# EAGLE board Tapuino-with-mux (EAGLE 7.1.0)
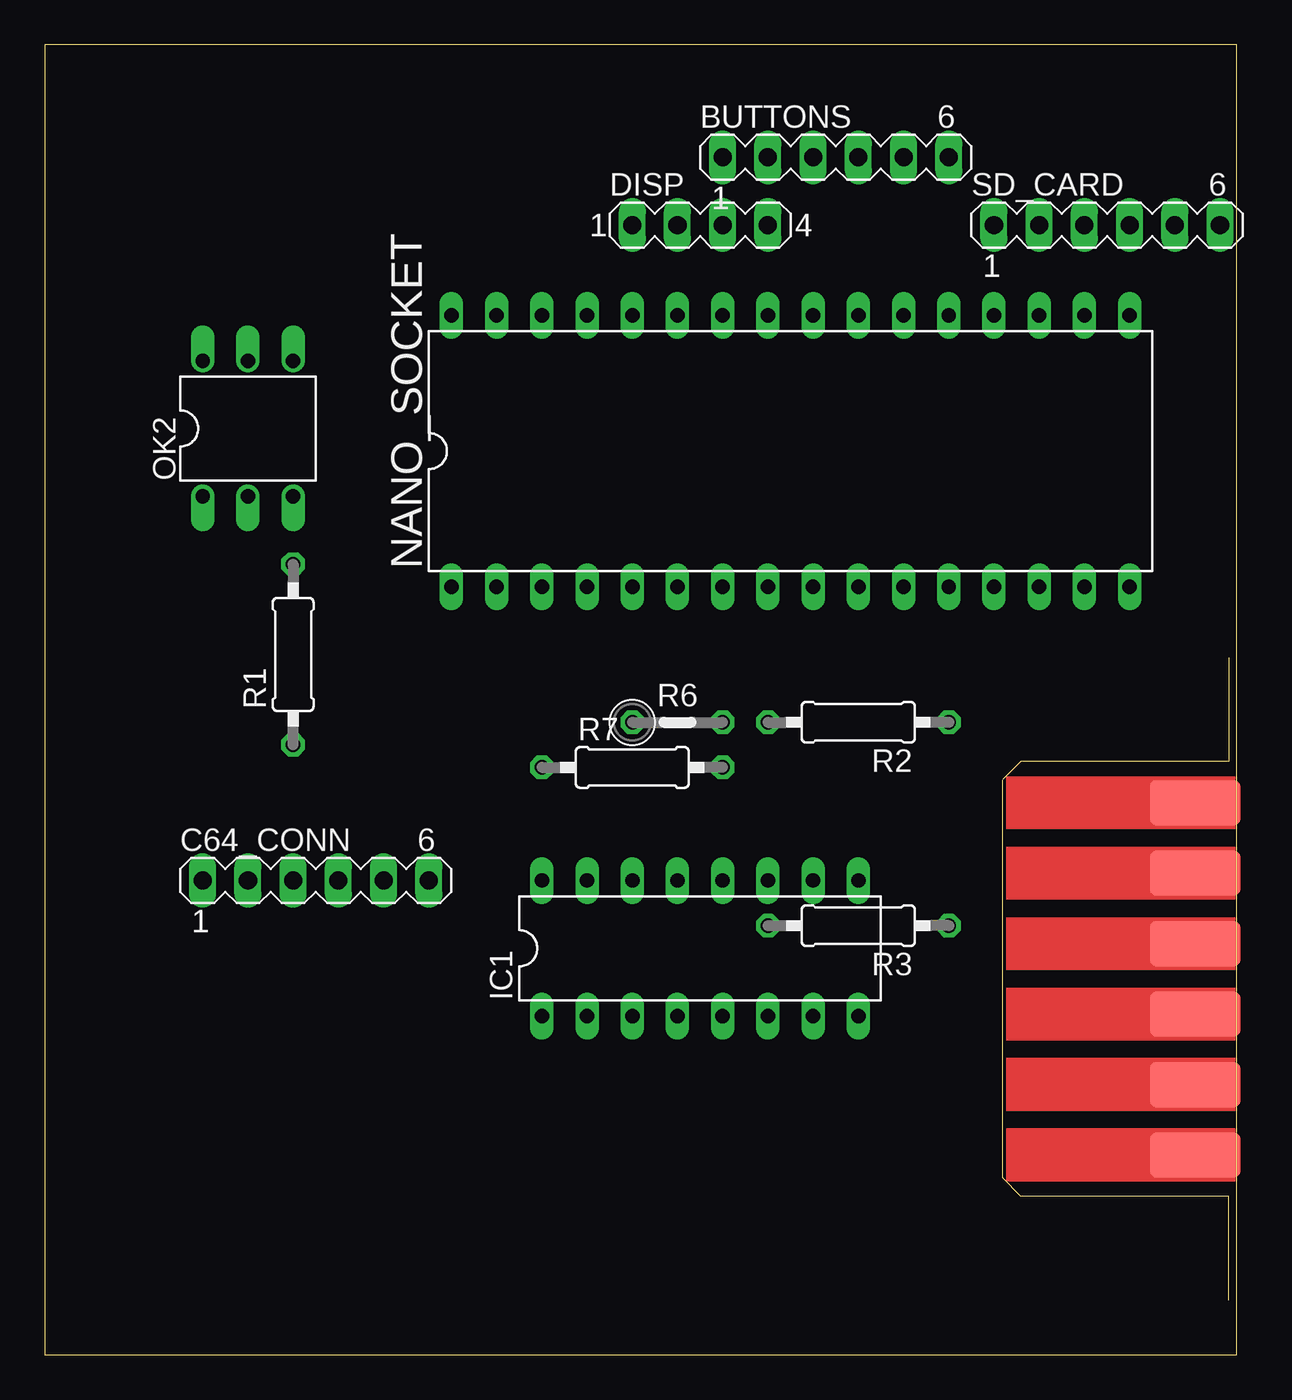
[diagram p0: board, top side]
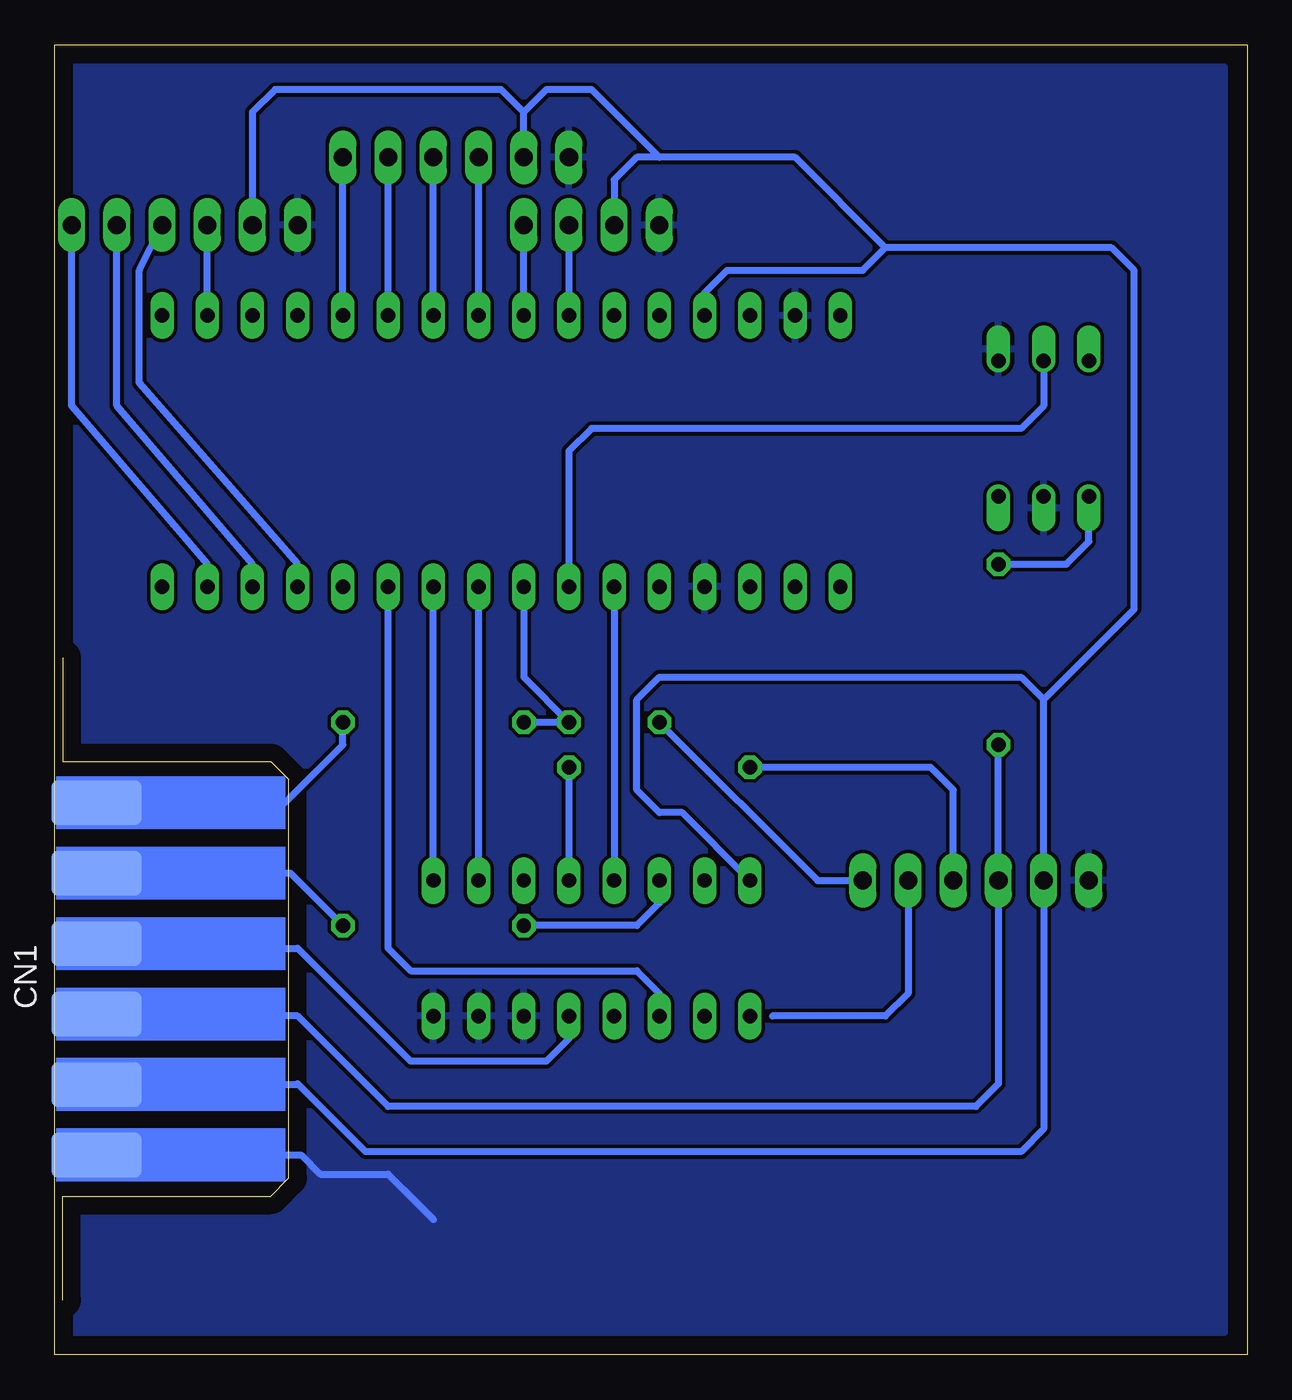
[diagram p1: board, bottom side, seen from below]

Size 66.98 x 73.65 mm. Coordinates in mm from the lower left corner, seen from the top.
Outline: 0,0 66.98,0 66.98,73.65 0,73.65 0,0
Copper layers (1*16): Top 0.035mm / dielectric 1.5mm / Bottom 0.035mm
Design rules "default": minimum track width 10mil, minimum drill 24mil, track to track 8mil, track to pad 8mil, pad to pad 8mil, via to via 8mil, smd to smd 8mil, copper to edge 40mil, drill to drill 8mil, minimum pad ring 10mil, minimum via ring 8mil, stop-mask expansion 4mil, vias tented up to drill 0mil, thermal gap 10mil

## Footprints (pad centres in the part's own frame; a part is rotated, then mirrored left to right if it is on the bottom)
MA06-1 = drill 1.016 long: 1 -6.35,0; 2 -3.81,0; 3 -1.27,0; 4 1.27,0; 5 3.81,0; 6 6.35,0
C64_CASSETTE = smd 2.54 x 5.08: 1 -21.779,3.68; 2 -17.819,3.68; 3 -13.859,3.68; 4 -9.899,3.68; 5 -5.939,3.68; 6 -1.979,3.68 | smd 2.54 x 5.08 bottom: A -21.779,3.68; B -17.819,3.68; C -13.859,3.68; D -9.899,3.68; E -5.939,3.68; F -1.979,3.68
MA04-1 = drill 1.016 long: 1 -3.81,0; 2 -1.27,0; 3 1.27,0; 4 3.81,0
DIL16 = drill 0.813 long: 1 -8.89,-3.81; 2 -6.35,-3.81; 3 -3.81,-3.81; 4 -1.27,-3.81; 5 1.27,-3.81; 6 3.81,-3.81; 7 6.35,-3.81; 8 8.89,-3.81; 9 8.89,3.81; 10 6.35,3.81; 11 3.81,3.81; 12 1.27,3.81; 13 -1.27,3.81; 14 -3.81,3.81; 15 -6.35,3.81; 16 -8.89,3.81
DIL32 = drill 0.813 long: 1 -19.05,-7.62; 2 -16.51,-7.62; 3 -13.97,-7.62; 4 -11.43,-7.62; 5 -8.89,-7.62; 6 -6.35,-7.62; 7 -3.81,-7.62; 8 -1.27,-7.62; 9 1.27,-7.62; 10 3.81,-7.62; 11 6.35,-7.62; 12 8.89,-7.62; 13 11.43,-7.62; 14 13.97,-7.62; 15 16.51,-7.62; 16 19.05,-7.62; 17 19.05,7.62; 18 16.51,7.62; 19 13.97,7.62; 20 11.43,7.62; 21 8.89,7.62; 22 6.35,7.62; 23 3.81,7.62; 24 1.27,7.62; 25 -1.27,7.62; 26 -3.81,7.62; 27 -6.35,7.62; 28 -8.89,7.62; 29 -11.43,7.62; 30 -13.97,7.62; 31 -16.51,7.62; 32 -19.05,7.62
DIL06 = drill 0.813 offset: 1 -2.54,-3.81; 2 0,-3.81; 3 2.54,-3.81; 4 2.54,3.81; 5 0,3.81; 6 -2.54,3.81
0207/10 = drill 0.813 octagon: 1 -5.08,0; 2 5.08,0
0207/5V = drill 0.813 octagon: 1 -2.54,0; 2 2.54,0

## Placement (x,y rotation side)
BUTTONS  [MA06-1]  44.45,67.31 0 top
C64_CONN  [MA06-1]  15.24,26.67 0 top
CN1  C64_CASETTE_EDGE  [C64_CASSETTE]  60.96,33.02 90 bottom
DISP  [MA04-1]  36.83,63.5 0 top
IC1  4052N  [DIL16]  36.83,22.86 0 top
NANO_SOCKET  [DIL32]  41.91,50.8 0 top
OK2  4N25M  [DIL06]  11.43,52.07 0 top
R1  430  [0207/10]  13.97,39.37 90 top
R2  0  [0207/10]  45.72,35.56 180 top
R3  0  [0207/10]  45.72,24.13 180 top
R6  0  [0207/5V]  35.56,35.56 0 top
R7  0  [0207/10]  33.02,33.02 0 top
SD_CARD  [MA06-1]  59.69,63.5 0 top

## Library data of the parts
BUTTONS C64_CONN DISP SD_CARD = con-lstb; OC_FARNELL: unknown; OC_NEWARK: unknown
CN1 = commodore
IC1 = 40xx
NANO_SOCKET = ic-package
OK2 = optocoupler; MPN: 4N25-M; OC_FARNELL: 1021349; OC_NEWARK: 98K9084
R1-R3 R6 R7 = resistor; SPICEPREFIX: R

## Nets
3V3: NANO_SOCKET.19
A0/BTN4: BUTTONS.6 NANO_SOCKET.21
A1/BTN3: BUTTONS.5 NANO_SOCKET.22
A2/BTN2: BUTTONS.4 NANO_SOCKET.23
A3/BTN1: BUTTONS.3 NANO_SOCKET.24
A4/SDA: DISP.4 NANO_SOCKET.25
A5/SCL: DISP.3 NANO_SOCKET.26
A6: NANO_SOCKET.27
A7: NANO_SOCKET.28
AREF: NANO_SOCKET.20
C64/R_0OHM: C64_CONN.4 R7.1
C64/READ: IC1.12 R7.2
C64/W_0OHM: C64_CONN.5
C64/WRITE: IC1.1
D0/RX: NANO_SOCKET.2
D1/TX: NANO_SOCKET.1
D2: NANO_SOCKET.5
D3/READ: IC1.13 NANO_SOCKET.6
D4/MCTRL: NANO_SOCKET.7 OK2.5
D5/S_0OHM: C64_CONN.6 R6.1
D5/S_0OHM2: CN1.6 R2.1
D5/SENSE: NANO_SOCKET.8 R2.2 R6.2
D6/CTRL1: IC1.10 NANO_SOCKET.9
D7/CTRL2: IC1.9 NANO_SOCKET.10
D8/WRITE: IC1.3 NANO_SOCKET.11
D9: NANO_SOCKET.12
D10/SS: NANO_SOCKET.13 SD_CARD.4
D11/MOSI: NANO_SOCKET.14 SD_CARD.5
D12/MISO: NANO_SOCKET.15 SD_CARD.6
D13/SCK: NANO_SOCKET.18 SD_CARD.3
D/W_0OHM: CN1.5 R3.1
DAT/READ: CN1.4 IC1.5
DAT/WRITE: IC1.14 R3.2
GND: BUTTONS.1 C64_CONN.1 CN1.1 DISP.1 IC1.6 IC1.7 IC1.8 NANO_SOCKET.4 NANO_SOCKET.31 OK2.2 OK2.4 SD_CARD.1
MOTOR: C64_CONN.3 CN1.3 R1.1
N$5: IC1.15
N$6: IC1.11
N$9: IC1.2
N$10: IC1.4
OPTO-IN: OK2.1 R1.2
RESET1: NANO_SOCKET.30
RESET2: NANO_SOCKET.3
VCC: BUTTONS.2 C64_CONN.2 CN1.2 DISP.2 IC1.16 NANO_SOCKET.29 SD_CARD.2
VIN: NANO_SOCKET.32

## Tracks (layer width: path | path; a pad name or v marks a point on that pad's centre or on a via)
A0/BTN4
  Bottom 0.406: NANO_SOCKET.21 BUTTONS.6
A1/BTN3
  Bottom 0.406: NANO_SOCKET.22 BUTTONS.5
A2/BTN2
  Bottom 0.406: NANO_SOCKET.23 BUTTONS.4
A3/BTN1
  Bottom 0.406: NANO_SOCKET.24 BUTTONS.3
A4/SDA
  Bottom 0.406: NANO_SOCKET.25 DISP.4
A5/SCL
  Bottom 0.406: DISP.3 NANO_SOCKET.26
C64/R_0OHM
  Bottom 0.406: C64_CONN.4 16.51,31.75 17.78,33.02 R7.1
C64/READ
  Bottom 0.406: R7.2 IC1.12
C64/W_0OHM
  Bottom 0.406: C64_CONN.5 19.05,20.32 20.32,19.05 26.67,19.05
D3/READ
  Bottom 0.406: NANO_SOCKET.6 IC1.13
D4/MCTRL
  Bottom 0.406: OK2.5 11.43,53.34 12.7,52.07 36.83,52.07 38.1,50.8 NANO_SOCKET.7
D5/S_0OHM
  Bottom 0.406: R6.1 24.13,26.67 C64_CONN.6
D5/S_0OHM2
  Bottom 0.406: CN1.6 54.05,31.04 50.8,34.29 R2.1
D5/SENSE
  Bottom 0.406: R2.2 R6.2 40.64,38.1 NANO_SOCKET.8
D6/CTRL1
  Bottom 0.406: IC1.10 NANO_SOCKET.9
D7/CTRL2
  Bottom 0.406: IC1.9 NANO_SOCKET.10
D8/WRITE
  Bottom 0.406: NANO_SOCKET.11 48.26,22.86 46.99,21.59 34.29,21.59 33.02,20.32 IC1.3
D10/SS
  Bottom 0.406: NANO_SOCKET.13 53.34,44.45 62.23,54.61 62.23,60.96 SD_CARD.4
D11/MOSI
  Bottom 0.406: NANO_SOCKET.14 55.88,44.45 63.5,53.34 SD_CARD.5
D12/MISO
  Bottom 0.406: NANO_SOCKET.15 58.42,44.45 66.04,53.34 SD_CARD.6
D13/SCK
  Bottom 0.406: NANO_SOCKET.18 SD_CARD.3
D/W_0OHM
  Bottom 0.406: CN1.5 53.75,27.08 R3.1
DAT/READ
  Bottom 0.406: IC1.5 38.1,17.78 39.37,16.51 46.99,16.51 53.34,22.86 64.38,22.86 CN1.4
DAT/WRITE
  Bottom 0.406: IC1.14 33.02,25.4 34.29,24.13 R3.2
GND
  Bottom 0.406: CN1.1 53.15,11.24 52.07,10.16 48.26,10.16 45.72,7.62
  pour Bottom: 1.27,72.39 66.04,72.39 66.04,1.27 1.27,1.27
MOTOR
  Bottom 0.406: R1.1 C64_CONN.3 13.97,15.24 15.24,13.97 48.26,13.97 53.34,19.05 64.53,19.05 CN1.3 65.8,19.05 64.77,20.32
OPTO-IN
  Bottom 0.406: R1.2 10.16,44.45 8.89,45.72 OK2.1
VCC
  Bottom 0.406: 40.64,69.85 41.91,71.12 54.61,71.12 55.88,69.85 SD_CARD.2 | BUTTONS.2 40.64,69.85 | 40.64,69.85 39.37,71.12 36.83,71.12 33.02,67.31 | 20.32,62.23 21.59,60.96 29.21,60.96 30.48,59.69 NANO_SOCKET.29 | 20.32,62.23 7.62,62.23 6.35,60.96 6.35,41.91 11.43,36.83 | 20.32,62.23 25.4,67.31 33.02,67.31 | 11.43,36.83 12.7,38.1 33.02,38.1 34.29,36.83 34.29,31.75 33.02,30.48 31.75,30.48 IC1.16 | 11.43,36.83 C64_CONN.2 11.43,12.7 12.7,11.43 49.53,11.43 53.34,15.24 53.38,15.2 CN1.2 | 33.02,67.31 34.29,67.31 35.56,66.04 DISP.2